# Altium PCB Capacitive sensor board.PcbDoc
Units mm, origin at the board's own origin, x right, y up, seen from the top; angles counter-clockwise.
Board outline 34 x 15 mm, 2 copper layers (Component Side, Bottom Layer), stack 0.98 mm thick; 2 components, 2 nets, 6 pads, 13 vias.
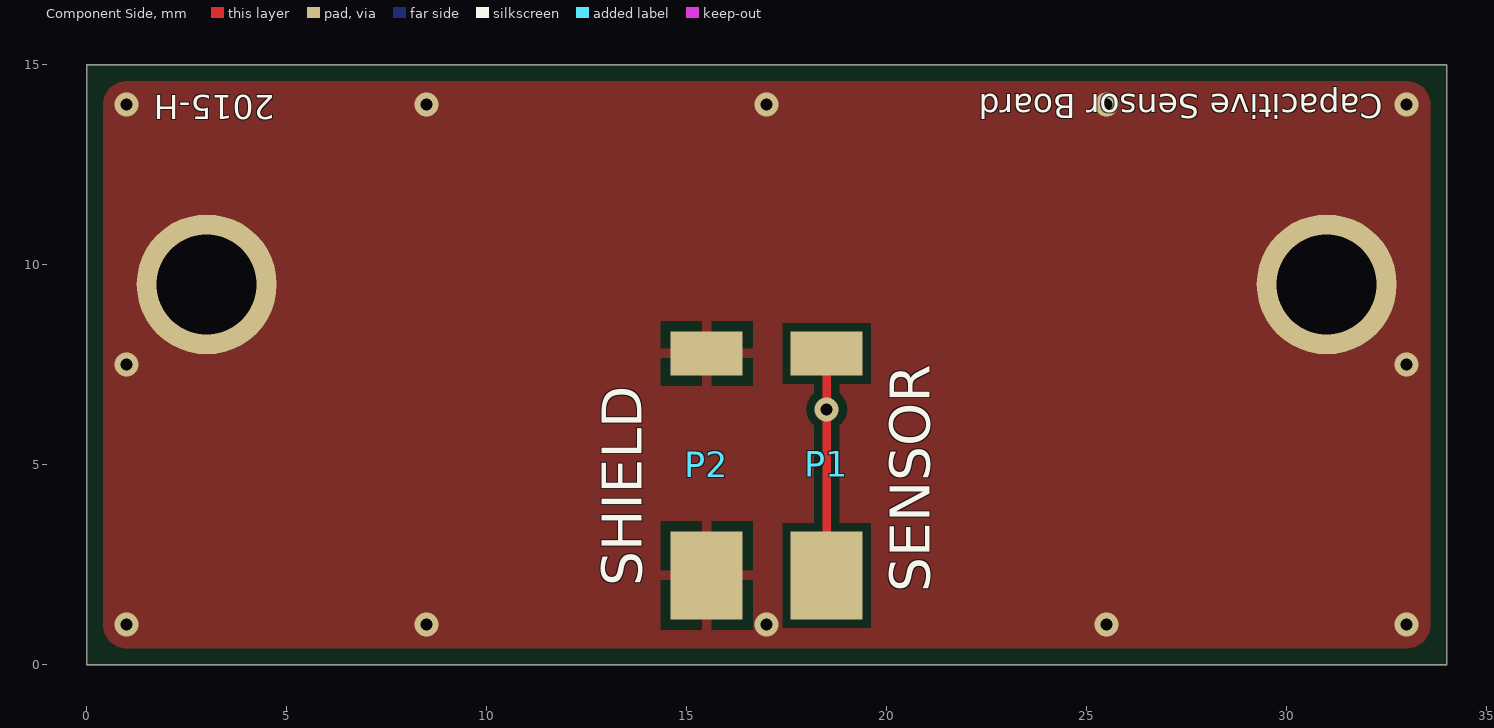
[diagram p0: Component Side view]
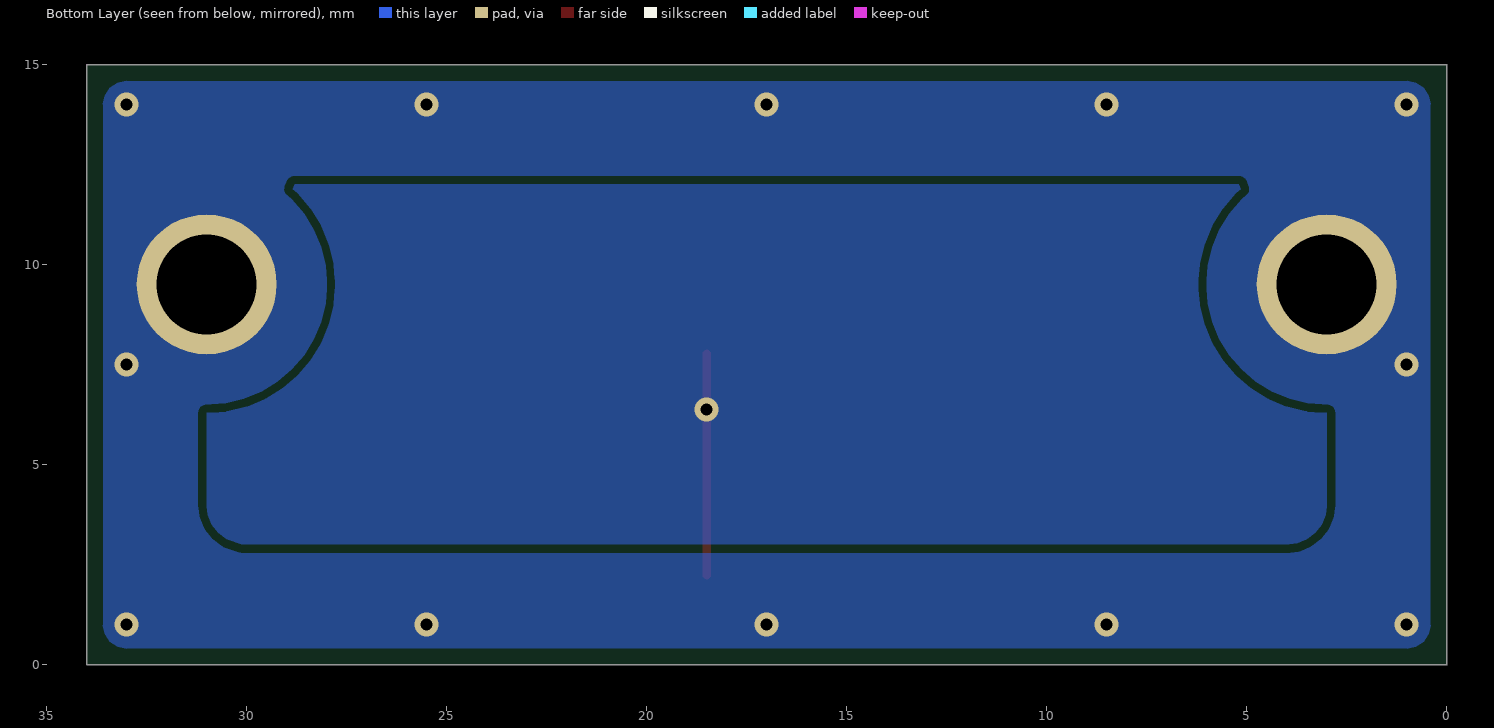
[diagram p1: Bottom Layer view, seen from below]

## Layer stack, top to bottom
Top Solder: solder mask 0.0102, Solder Resist, Dk 3.5
Component Side: signal copper 0.0356
Dielectric 1: core 0.9086, FR-4, Dk 4.2
Bottom Layer: signal copper 0.0356
Solder Side: solder mask 0.0102, Solder Resist, Dk 3.5

## Board outline
0,-0.009 34,-0.009 34,14.991 0,14.991

## Design rules (kind name [scope] priority, off if disabled: settings)
Clearance "Board outline" [InPolygon vs OnLayer('Keep-Out Layer')] p1: gap=0.4
Clearance Fiducials [(InComponent('Fid1'))or (InComponent('Fid2'))or  (InComponent('Fid3'))] p2: gap=0.762
Clearance [All] p3: gap=0.203
HoleSize [All] p1: absolutevalues=TRUE maxlimit=4.3 minlimit=0.025 maxpercent=80.000 minpercent=20.000
HoleToHoleClearance HoleToHoleClearance_1 [InComponent('P1') or InComponent('P2') or InComponent('P3') or InComponent('P5') or InComponent('P6')] p1: gap=0.178 allowstackedmicrovias=TRUE
HoleToHoleClearance [All] p2: gap=0.254 allowstackedmicrovias=TRUE
MinimumSolderMaskSliver [All] p1 off: minsoldermaskwidth=0.051
PlaneClearance [All] p1: clearance=0.203
PlaneConnect [All] p1: planeconnectstyle=Relief reliefexpansion=0.203 reliefentries=4 reliefconductorwidth=0.203 reliefairgap=0.203
PolygonConnect PolygonConnect_1 [InComponent('P2')] p1: connectstyle=Relief reliefconductorwidth=0.254 reliefentries=4 polygonreliefangle="90 Angle" airgapwidth=0.254
PolygonConnect [All] p2: connectstyle=Direct reliefconductorwidth=0.254 reliefentries=4 polygonreliefangle="90 Angle" airgapwidth=0.254
RoutingVias [All] p1: holewidth=0.3 width=0.6 viastyle="Through Hole" minholewidth=0.3 minwidth=0.6 maxholewidth=1 maxwidth=3
SilkToSilkClearance [All] p1: silktosilkclearance=0
SilkToSolderMaskClearance SilkscreenOverComponentPads [IsPad] p1: minsilkscreentomaskgap=0.127 clearancetoexposedcopper=TRUE
SolderMaskExpansion [All] p1: expansion=0.102
Width [All] p1: maxlimit=10 minlimit=0.203 preferedwidth=0.203
23 further rules are at their usual default settings.

## Components (designator, comment, footprint, x,y, rotation, side; value= is the part's Value field where it differs from the comment)
P1 "" "AVX POKE HOME CONTACT 1.7MM" 18.5,5 r270 top
P2 "" "AVX POKE HOME CONTACT 1.7MM" 15.5,5 r270 top locked

## Footprints (in the part's own frame and the unit in brackets; to place one, negate y for a bottom-side part, rotate by r counter-clockwise, add the part's x,y. Pads: shape width x height; smd on the part's side, far side on the other; paste and mask are expansions set on the pad)
"AVX POKE HOME CONTACT 1.7MM" [mm] "70-9296-001-017-006"
  rect 1.1x1.8 smd: 1(-2.775,0)
  rect 2.2x1.8 smd: 1(2.775,0)
  body extent -3.22,-0.8 3.78,0.8, height 1.7

## Part data
P1 P2: library part Plug, "Plug"

## Free pads (board coordinates)
  round 3.5 hole 2.5: 0(3,9.5) 0(31,9.5)

## Via types
v1: diameter 0.6, hole 0.3, Component Side to Bottom Layer, tented both sides, 13 vias

## Nets (pads, with @x,y where several pads share a name; then routed paths per layer and width w, separated by ;. In a path a pad name is that pad's centre, name@x,y a point inside that pad or via, vN(x,y) a via of type N, cw(c..) or ccw(c..) an arc to the next point about the centre after c; other vN are vias at no path point)
SENSOR: P1.1 | length 5.5
  Component Side w0.203: P1.1@18.5,2.225 v1(18.5,6.375) P1.1@18.5,7.775
SHIELD: P2.1 pad.0
  other v1: 1,1 8.5,1 17,1 25.5,1 33,1 1,7.5 33,7.5 1,14 8.5,14 17,14 25.5,14 33,14

## Polygon pours and split planes (outlines as drawn)
SHIELD on Bottom Layer "Shield" (solid, remove dead copper, pour order 15): 1,-0.009 cw(c1,0.991) 0,0.991 0,13.991 cw(c1,13.991) 1,14.991 33,14.991 cw(c33,13.991) 34,13.991 34,0.991 cw(c33,0.991) 33,-0.009
SHIELD on Bottom Layer "Shield" (solid, remove dead copper, pour order 6): 31,6.5 cw(c31,9.5) 28,9.5 cw(c31,9.5) 31,12.5 cw(c31,9.5) 34,9.5 cw(c31,9.5)
SHIELD on Bottom Layer "Shield" (solid, remove dead copper, pour order 7): 3,6.5 cw(c3,9.5) 0,9.5 cw(c3,9.5) 3,12.5 cw(c3,9.5) 6,9.5 cw(c3,9.5)
SENSOR on Bottom Layer "SENSOR" (solid, remove dead copper, pour order 8): 3,4 ccw(c4,4) 4,3 30,3 ccw(c30,4) 31,4 31,11 ccw(c30,11) 30,12 4,12 ccw(c4,11) 3,11
SHIELD on Component Side "Shield" (solid, remove dead copper, pour order 12): 1,-0.009 cw(c1,0.991) 0,0.991 0,13.991 cw(c1,13.991) 1,14.991 33,14.991 cw(c33,13.991) 34,13.991 34,0.991 cw(c33,0.991) 33,-0.009

## Keep-outs
Keep-Out Layer:
  lines w0.001: 0,-0.009 34,-0.009 34,14.991 0,14.991 ; 0,-0.009 0,-0.009 ; 0,-0.009 0,14.991 ; 0,-0.009 0,-0.009 ; 0,14.991 0,14.991 ; 0,14.991 0,14.991

## Silkscreen, mask and mechanical layers (free items; w line width, h text height)
Top Overlay:
  text "Capacitive Sensor Board" at 32.4,14.25 h0.6 r180
  text "2015-H" at 4.7,14.225 h0.6 r180
  text "SHIELD" at 13.875,1.95 h1 r90
  text "SENSOR" at 21.075,1.8 h1 r90
Board Outline:
  lines w0.001: 0,-0.009 34,-0.009 34,14.991 0,14.991 ; 0,-0.009 0,-0.009 ; 0,-0.009 0,14.991 ; 0,-0.009 0,-0.009 ; 0,14.991 0,14.991 ; 0,14.991 0,14.991